# Altium PCB pira-smart-pcb.PcbDoc (part 1 of 3)
Units mm, origin at the board's own origin, x right, y up, seen from the top; angles counter-clockwise.
Board outline 65.1 x 30.1 mm, 2 copper layers (Top Layer, Bottom Layer); 85 components, 83 nets, 351 pads, 324 vias.
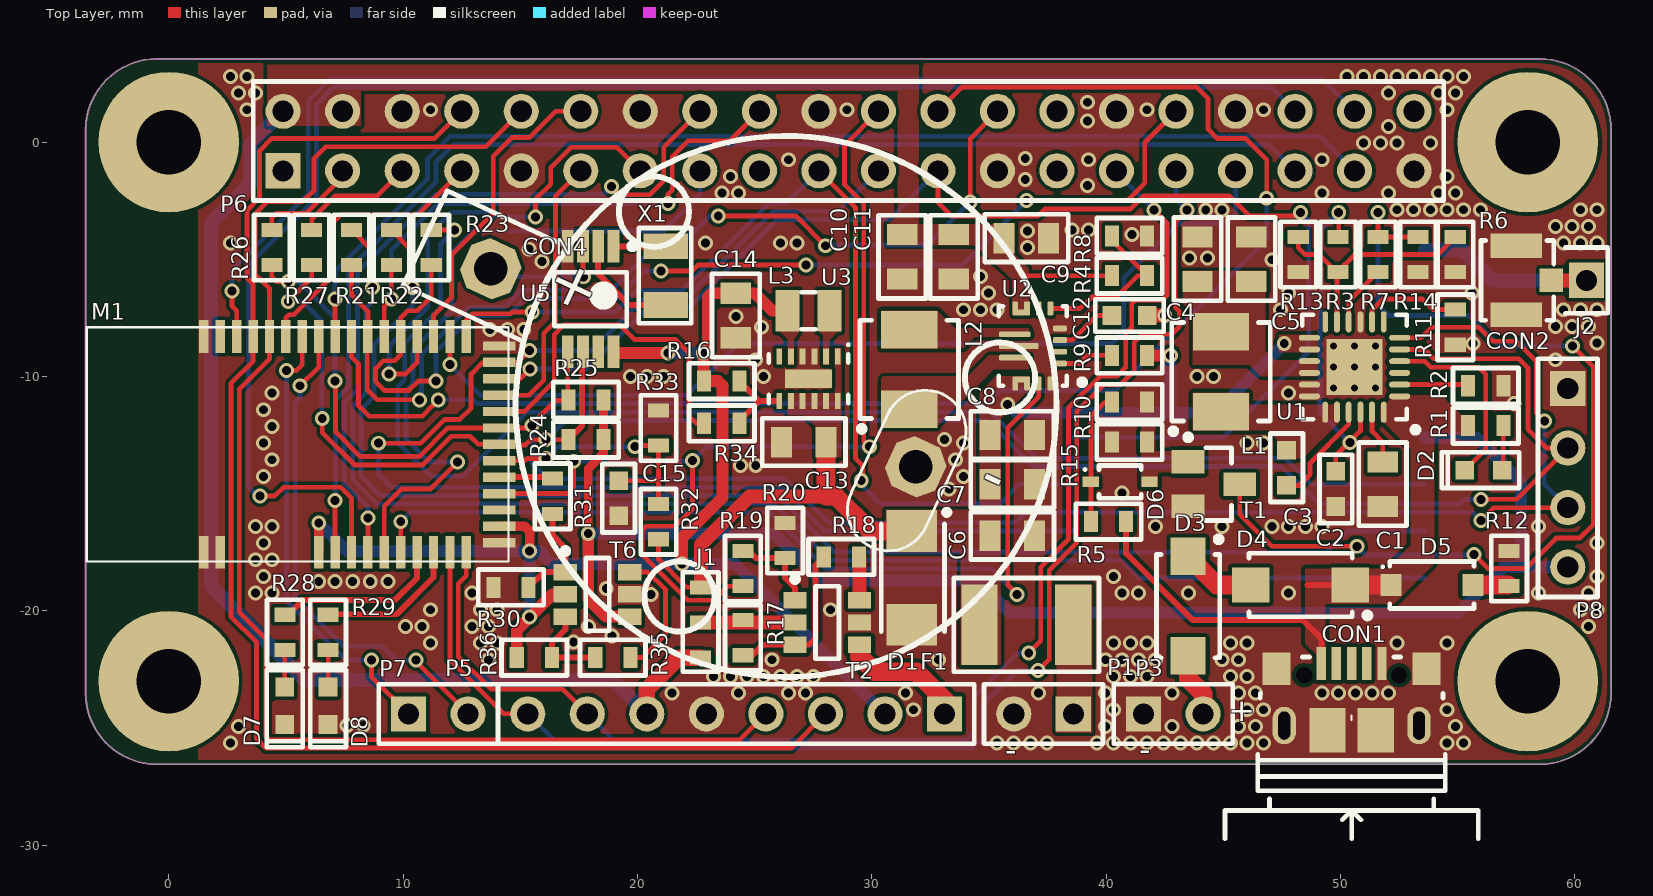
[diagram p0: Top Layer view]
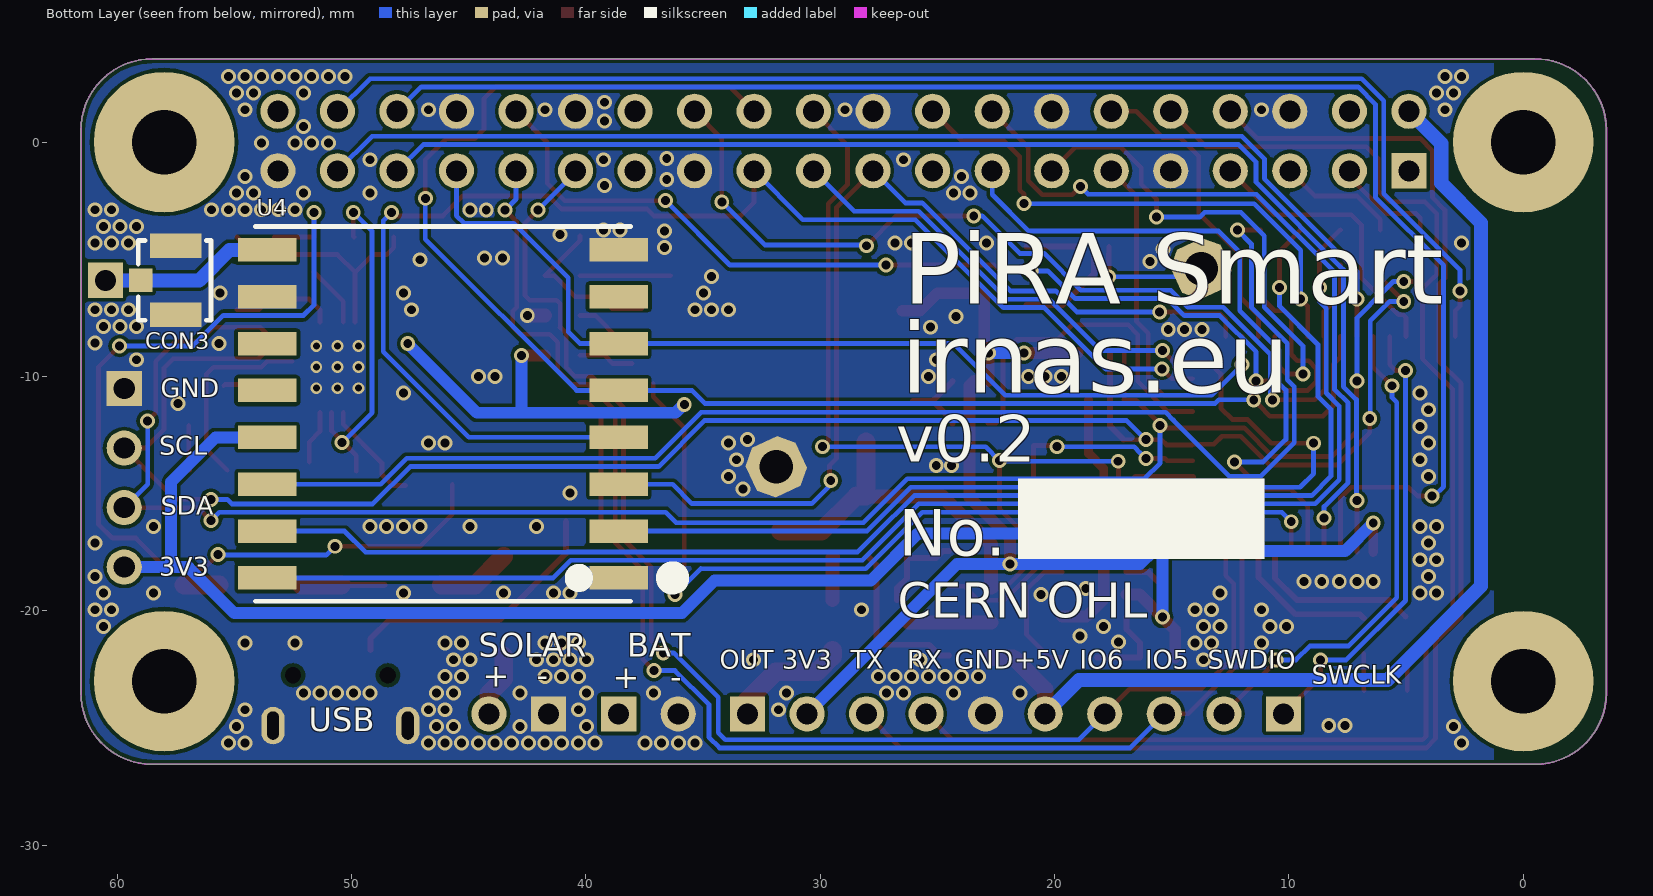
[diagram p1: Bottom Layer view, seen from below]

## Layer stack, top to bottom
Top Solder: solder mask 0.0102, Solder Resist, Dk 3.5
Top Layer: signal copper 0.0356
Dielectric 1: dielectric 0.32, FR-4, Dk 4.8
Bottom Layer: signal copper 0.0356
Bottom Solder: solder mask 0.0102, Solder Resist, Dk 3.5

## Board outline
-3.55,-23.5 -3.55,0.5 cw(c-0.5,0.5) -0.501,3.55 cw(c-0.5,3.5) -0.5,3.55 58.5,3.55 cw(c58.5,0.5) 61.55,0.5 61.55,-23.5 cw(c58.5,-23.5) 58.5,-26.55 -0.5,-26.55 cw(c-0.5,-23.5)

## Design rules (kind name [scope] priority, off if disabled: settings)
Clearance [All] p1: gap=0.152 ignorepadtopadclearanceinfootprint=FALSE except(0.076: SMDPad-SMDPad)
ComponentClearance [All] p1: gap=0 collisioncheckmode=3 verticalgap=0 showdistances=FALSE
HoleSize [All] p1: absolutevalues=TRUE maxlimit=3 minlimit=0.3 maxpercent=80.000 minpercent=20.000
PolygonConnect [All] p1: connectstyle=Direct reliefconductorwidth=0.254 reliefentries=4 polygonreliefangle="90 Angle" airgapwidth=0.254
RoutingVias [All] p1: holewidth=0.711 width=1.27 viastyle="Through Hole" minholewidth=0.711 minwidth=1.27 maxholewidth=0.711 maxwidth=1.27
SilkToSilkClearance [All] p1: silktosilkclearance=0
SolderMaskExpansion [All] p1: expansion=0.102
Width [All] p1: maxlimit=3 minlimit=0.203 preferedwidth=0.203
27 further rules are at their usual default settings.

## Components (designator, comment, footprint, x,y, rotation, side; value= is the part's Value field where it differs from the comment)
C1 "10uF /16V" CAP0805 51.8,-14.6 r270 top
C2 "4u7/16V" CAP0603 49.8,-14.8 r270 top
C3 "47n" CAP0603 47.7,-13.9 r270 top
C4 "10uF /16V" CAP0805 43.9,-5 r90 top
C5 "10uF /16V" CAP0805 46.2,-5 r90 top
C6 "10uF /16V" CAP0805 36,-16.8 r180 top
C7 "22u" CAP0805 36,-14.6 r180 top
C8 "22u" CAP0805 36,-12.5 r180 top
C9 "22u" CAP0805 36.6,-4.1 r180 top
C10 "22u" CAP0805 31.3,-4.9 r90 top
C11 "10uF /16V" CAP0805 33.5,-4.9 r90 top
C12 "100nF" CAP0603 41,-7.4 r180 top
C13 "10uF /16V" CAP0805 27.1,-12.8 r0 top
C14 "10uF /16V" CAP0805 24.2,-7.4 r90 top
C15 "33nF" CAP0603 19.2,-15.2 r90 top
CON1 "microUSB" microUSB-CHINA 50.475,-23.675 r0 top
CON2 "U.FL-R-SMT-1(10)" "uFL SMD connector" 57.5,-5.9 r270 top
CON3 "U.FL-R-SMT-1(10)" "uFL SMD connector" 57.5,-5.9 r90 bottom
CON4 "BATTERY" 1066_1066(PRIMARY) 26.322,-11.272 r155 top locked
D1 "RS1J-E3/61T.." SMC/DO-214AC 31.7,-18.6 r270 top
D2 "LED RED" LED0603 56.1,-14 r0 top
D3 "SE30AFG-M3/6A" SODFL127P600-8N 43.5,-19.8 r270 top
D4 "SE30AFG-M3/6A" SODFL127P600-8N 48.3,-18.9 r180 top
D5 "BZT52C6V2" SOD123 53.9,-18.9 r0 top
D6 "3V" "SOD-323 2L" 40.6,-14.5 r0 top
D7 "LED RED" LED0603 4.95,-24.05 r90 top
D8 "LED RED" LED0603 6.8,-24.05 r90 top
F1 "3A" Chip2PinSM127P600-8N 36.6,-20.6 r0 top
J1 "Jumper" JUMPER_NC 22.7,-19 r270 top
J2 "Socket" PIN1 60.5,-5.9 r180 top
L1 "1.5uH" FDSD0402 44.9,-9.8 r180 top
L2 "1.5uH" FDSD0402 31.6,-9.7 r180 top
L3 "2.2µH" INDC2214X15N 27.3,-7.2 r180 top
M1 "MDBT40" PCB_MDBT40_10X18 -3.5,-12.9 r90 top
P1 "Header 2" HDR1X2 38.6,-24.4 r180 top
P3 "Header 2" HDR1X2 41.6,-24.4 r0 top
P5 "Header 8" HDR1X8 33.1,-24.4 r180 top
P6 "Header 20X2" HDR2X20 4.882,-1.227 r0 top
P7 "Header 2" HDR1X2 10.236,-24.4 r0 top
P8 "Header 4" HDR1X4 59.7,-10.52 r270 top
R1 "470R" RES0603 56.2,-12.1 r0 top
R2 "0R" RES0603 56.2,-10.4 r180 top
R3 "5k6" RES0603 49.9,-4.8 r90 top
R4 "0R" RES0603 41,-5.7 r180 top
R5 "3k9" RES0603 40.1,-16.2 r0 top
R6 "10k" RES0603 54.9,-4.8 r90 top
R7 "220R" RES0603 51.6,-4.8 r270 top
R8 "150k" RES0603 41,-4 r180 top
R9 "10k" RES0603 41,-9.1 r180 top
R10 "10k" RES0603 41,-11.1 r180 top
R11 "0R" RES0603 54.9,-7.9 r90 top
R12 "10R" RES0603 57.2,-18.2 r270 top
R13 "33k" RES0603 48.2,-4.8 r90 top
R14 "470R" RES0603 53.3,-4.8 r90 top
R15 "10k" RES0603 41,-12.8 r0 top
R16 "100k" RES0603 23.6,-10.2 r0 top
R17 "100k" RES0603 24.5,-21.15 r270 top
R18 "100R" RES0603 28.7,-17.7 r0 top
R19 "100R" RES0603 24.5,-18.2 r270 top
R20 "100k" RES0603 26.3,-17 r90 top
R21 "10k" RES0603 7.8,-4.5 r90 top
R22 "10k" RES0603 9.5,-4.5 r90 top
R23 "10k" RES0603 11.2,-4.5 r90 top
R24 "4k7" RES0603 17.8,-12.7 r0 top
R25 "4k7" RES0603 17.8,-11 r0 top
R26 "0R" RES0603 4.4,-4.5 r270 top
R27 "0R" RES0603 6.1,-4.5 r270 top
R28 "470R" RES0603 4.952,-20.921 r270 top
R29 "470R" RES0603 6.802,-20.921 r270 top
R30 "100k" RES0603 14.6,-19 r180 top
R31 "100R" RES0603 16.383,-15.113 r90 top
R32 "249k" RES0603 20.9,-16.2 r270 top
R33 "100k" RES0603 20.9,-12.2 r270 top
R34 "0R" RES0603 23.6,-12 r180 top
R35 "100R" RES0603 18.95,-22 r0 top
R36 "100k" RES0603 15.6,-22 r180 top
T1 "MMBT3904" SOT23127P600-8N 44.6,-14.6 r0 top
T2 "DMG6602SVT" TSOT26 28.1,-20.5 r0 top
T6 "DMG6602SVT" TSOT26 18.3,-19.3 r0 top
U1 "BQ24296RGET" QFN4x4 50.6,-9.6 r0 top
U2 "TPS630701RNMT" "VQFN TPS" 37.063,-8.7 r90 top
U3 "TPS62740DSSR" SON50P200X265_HS-13N 27.3,-10.1 r270 top
U4 "Lora RFM95" Lora_module1 38.1,-3.6 r0 bottom
U5 "ISL1208IU8Z-T7A" TSOP65P500X110-8N 18,-6.7 r270 top
X1 "32.768KHZ" LFXTAL009678 21.2,-5.7 r90 top

## Footprints (in the part's own frame and the unit in brackets; to place one, negate y for a bottom-side part, rotate by r counter-clockwise, add the part's x,y. Pads: shape width x height; smd on the part's side, far side on the other; paste and mask are expansions set on the pad)
1066_1066(PRIMARY) [mm]
  oct 2.35x2.35 hole 1.422: NEG(-6.125,0) POS(13.875,0)
  silkscreen extent -11.57,-11.54 16.98,11.54, body extent -10.89,-11.5 16.54,11.5, height 8.68
CAP0603 [mm]
  rect 0.8x0.8 smd: 1(-0.75,0) 2(0.75,0)
  silkscreen extent -1.46,-0.7 1.46,0.7, body extent -0.8,-0.4 0.8,0.4, height 0.9
CAP0805 [mm]
  rect 0.9x1.3 smd: 1(-0.95,0) 2(0.95,0)
  silkscreen extent -1.78,-1.02 1.78,1.02, body extent -1,-0.6 1,0.6, height 1.5
Chip2PinSM127P600-8N [mm]
  rect 1.55x3.45 smd: 1(-2,0) 2(2,0)
  silkscreen extent -3.1,-2 3.1,2, body extent -2.41,-1.7 2.41,1.71, height 1.94
FDSD0402 [mm]
  rect 2.4x1.6 smd: 1(0,1.7) 2(0,-1.7)
  silkscreen extent -2.1,-2.1 2.16,2.66, body extent -2.1,-2.2 2.1,2.2, height 2.1
HDR1X2 [mm] "Connector; Header; 2 Position"
  rect 1.5x1.5 hole 0.9: 1(0,0)
  round 1.5 hole 0.9: 2(2.54,0)
  silkscreen extent -1.27,-1.27 3.81,1.27
HDR1X4 [mm] "Connector; Header; 4 Position"
  rect 1.5x1.5 hole 0.9: 1(0,0)
  round 1.5 hole 0.9: 2(2.54,0) 3(5.08,0) 4(7.62,0)
  silkscreen extent -1.27,-1.27 8.89,1.27
HDR1X8 [mm] "Connector; Header; 8 Position"
  rect 1.5x1.5 hole 0.9: 1(0,0)
  round 1.5 hole 0.9: 2(2.54,0) 3(5.08,0) 4(7.62,0) 5(10.16,0) 6(12.7,0) 7(15.24,0) 8(17.78,0)
  silkscreen extent -1.27,-1.27 19.05,1.27
HDR2X20 [mm] "Connector; Header; 20x2 Position"
  rect 1.5x1.5 hole 0.9: 1(0,0)
  round 1.5 hole 0.9: 2(0,2.54) 3(2.54,0) 4(2.54,2.54) 5(5.08,0) 6(5.08,2.54) 7(7.62,0) 8(7.62,2.54) 9(10.16,0) 10(10.16,2.54) 11(12.7,0) 12(12.7,2.54) 13(15.24,0) 14(15.24,2.54) 15(17.78,0) 16(17.78,2.54) 17(20.32,0) 18(20.32,2.54) 19(22.86,0) 20(22.86,2.54) 21(25.4,0) 22(25.4,2.54) 23(27.94,0) 24(27.94,2.54) 25(30.48,0) 26(30.48,2.54) 27(33.02,0) 28(33.02,2.54) 29(35.56,0) 30(35.56,2.54) 31(38.1,0) 32(38.1,2.54) 33(40.64,0) 34(40.64,2.54) 35(43.18,0) 36(43.18,2.54) 37(45.72,0) 38(45.72,2.54) 39(48.26,0) 40(48.26,2.54)
  silkscreen extent -1.27,-1.27 49.53,3.81
INDC2214X15N [mm] "Chip Inductor, 2-Leads, Body 2.20x1.45mm, IPC Medium Density"
  rect 1.02x1.78 smd: 1(-0.89,0) 2(0.89,0)
  silkscreen extent -0.3,-0.79 0.3,0.79, body extent -1.1,-0.72 1.1,0.73, height 1.49
JUMPER_NC [mm]
  rect 0.6x0.9 smd: 1(0,0) 2(3,0) 3(1.5,0)
  silkscreen extent -0.65,-0.76 3.6,0.76, body extent -0.05,-0.42 1.55,0.42, height 0.8
LED0603 [mm]
  rect 0.8x0.8 smd: 1(-0.8,0) 2(0.8,0)
  silkscreen extent -1.78,-0.76 1.52,0.76, body extent -0.85,-0.4 0.85,0.4, height 0.66
LFXTAL009678 [mm]
  rect 1.1x1.9 smd: 1(-1.25,0) 2(1.25,0)
  silkscreen extent -2.03,-1.1 2.03,1.14, body extent -1.65,-0.89 1.65,0.89, height 0.9
Lora_module1 [mm]
  rect 2.5x1 smd: 1(0.5,15) 2(0.5,13) 3(0.5,11) 4(0.5,9) 5(0.5,7) 6(0.5,5) 7(0.5,3) 8(0.5,1) 9(15.5,1) 10(15.5,3) 11(15.5,5) 12(15.5,7) 13(15.5,9) 14(15.5,11) 15(15.5,13) 16(15.5,15)
  silkscreen extent -2.16,0 16,16, body extent 0,0.1 16,16, height 2.23
microUSB-CHINA [mm]
  rect 0.4x1.4 smd mask+0.05: 1(-1.3,1.425) 2(-0.65,1.425) 3(0,1.425) 4(0.65,1.425) 5(1.3,1.425)
  rect 1.2x1.4 smd: 6(-3.2,1.2) 7(3.2,1.2)
  oval 1x1.6 hole 0.5 slot 1.2 at 90 deg: 8(-2.875,-1.225) 9(2.875,-1.225)
  rect 1.55x1.9 smd paste-10: 10(-1.025,-1.425) 11(1.025,-1.425)
  rect 0x0 hole 0.7 unplated: ""(-2.028,0.925) ""(2.022,0.925)
  silkscreen extent -5.4,-6.05 5.4,1.7, body extent -4.04,-3.83 4.04,1.73, height 2.77
PCB_MDBT40_10X18 [mm]
  rect 1.4x0.4 smd: 1(-4.6,-5) 2(-4.6,-5.7) 3(-4.6,-9.9) 4(-4.6,-10.6) 5(-4.6,-11.3) 6(-4.6,-12) 7(-4.6,-12.7) 8(-4.6,-13.4) 9(-4.6,-14.1) 10(-4.6,-14.8) 11(-4.6,-15.5) 12(-4.6,-16.2) 26(4.6,-16.2) 27(4.6,-15.5) 28(4.6,-14.8) 29(4.6,-14.1) 30(4.6,-13.4) 31(4.6,-12.7) 32(4.6,-12) 33(4.6,-11.3) 34(4.6,-10.6) 35(4.6,-9.9) 36(4.6,-9.2) 37(4.6,-8.5) 38(4.6,-7.8) 39(4.6,-7.1) 40(4.6,-6.4) 41(4.6,-5.7) 42(4.6,-5)
  rect 0.4x1.4 smd: 13(-4.2,-17.6) 14(-3.5,-17.6) 15(-2.8,-17.6) 16(-2.1,-17.6) 17(-1.4,-17.6) 18(-0.7,-17.6) 19(0,-17.6) 20(0.7,-17.6) 21(1.4,-17.6) 22(2.1,-17.6) 23(2.8,-17.6) 24(3.5,-17.6) 25(4.2,-17.6)
  silkscreen extent -5,-18 5,0
PIN1 [mm] "Connector; Plug"
  rect 1.5x1.5 hole 0.9: 1(0,0)
  silkscreen extent -0.9,-1.4 0.9,1.4
QFN4x4 [mm]
  oval 0.9x0.25 smd: 1(1.925,-1.25) 2(1.925,-0.75) 3(1.925,-0.25) 4(1.925,0.25) 5(1.925,0.75) 6(1.925,1.25) 13(-1.925,1.25) 14(-1.925,0.75) 15(-1.925,0.25) 16(-1.925,-0.25) 17(-1.925,-0.75) 18(-1.925,-1.25)
  oval 0.25x0.9 smd: 7(1.25,1.925) 8(0.75,1.925) 9(0.25,1.925) 10(-0.25,1.925) 11(-0.75,1.925) 12(-1.25,1.925) 19(-1.25,-1.925) 20(-0.75,-1.925) 21(-0.25,-1.925) 22(0.25,-1.925) 23(0.75,-1.925) 24(1.25,-1.925)
  rect 2.4x2.4 smd: 25(0,0)
  silkscreen extent -2.22,-2.8 2.73,2.22, body extent -2.09,-2.09 2.08,2.08, height 1
RES0603 [mm]
  rect 0.6x0.9 smd: 1(-0.75,0) 2(0.75,0)
  silkscreen extent -1.4,-0.76 1.4,0.76, body extent -0.8,-0.42 0.8,0.42, height 0.8
SMC/DO-214AC [mm]
  rect 1.78x2.16 smd: 1(-2,0) 2(2,0)
  silkscreen extent -2.91,-1.3 2.3,1.61, body extent -2.5,-1.35 2.5,1.35, height 2.21
SOD123 [mm] "SODFL, 2-Leads, Body 1.55x3.70mm, IPC Medium Density"
  rect 0.9x0.95 smd: 1(-1.75,0) 2(1.75,0)
  silkscreen extent -2.15,-1 1.8,1, body extent -1.85,-0.8 1.85,0.8, height 1.27
"SOD-323 2L" [mm]
  rect 0.7x0.45 smd: 1(-1.25,0) 2(1.25,0)
  silkscreen extent -1.55,-0.7 0.9,0.7, body extent -1.1,-0.67 1.1,0.68, height 1.1
SODFL127P600-8N [mm]
  rect 1.6x1.5 smd: 1(-2.125,0) 2(2.125,0)
  silkscreen extent -2.97,-1.35 2.2,1.43, body extent -2.6,-1.35 2.6,1.35, height 1
SON50P200X265_HS-13N [mm] "SON, 12-Leads, Body 3.00x2.00mm, Pitch 0.50mm, Thermal Pad 2.00x0.79mm, IPC Medium Density"
  rect 0.7x0.25 smd: 1(-0.95,1.25) 2(-0.95,0.75) 3(-0.95,0.25) 4(-0.95,-0.25) 5(-0.95,-0.75) 6(-0.95,-1.25) 7(0.95,-1.25) 8(0.95,-0.75) 9(0.95,-0.25) 10(0.95,0.25) 11(0.95,0.75) 12(0.95,1.25)
  rect 0.79x2 smd: 13(0,0)
  silkscreen extent -1.5,-1.7 1.05,1.75, body extent -1.13,-1.55 1.13,1.55, height 2.65
SOT23127P600-8N [mm]
  rect 1.4x1 smd: 1(-1.1,0.95) 2(-1.1,-0.95) 3(1.1,0)
  silkscreen extent -1.22,-1.55 0.75,2.12, body extent -1.35,-1.56 1.35,1.56, height 1.2
TSOP65P500X110-8N [mm] "TSOP, 8-Leads, Body 3.00x3.00mm, Pitch 0.65mm, IPC Medium Density"
  rect 1.4x0.5 smd: 1(-2.25,0.975) 2(-2.25,0.325) 3(-2.25,-0.325) 4(-2.25,-0.975) 5(2.25,-0.975) 6(2.25,-0.325) 7(2.25,0.325) 8(2.25,0.975)
  silkscreen extent -2.37,-1.55 1.15,1.9, body extent -1.55,-1.55 1.55,1.55, height 1.1
TSOT26 [mm]
  rect 1x0.7 smd: 1(-1.375,0.95) 2(-1.375,0) 3(-1.375,-0.95) 4(1.375,-0.95) 5(1.375,0) 6(1.375,0.95)
  silkscreen extent -1.5,-1.55 0.5,1.97, body extent -1.5,-1.55 1.5,1.55, height 1
"uFL SMD connector" [mm]
  rect 1x1 smd: 1(0,1.5)
  rect 1.05x2.2 smd: 2(-1.475,0) 2(1.475,0)
  silkscreen extent -1.7,-1.5 1.7,1.6, body extent -1.7,-1.55 1.7,1.55, height 1.25
"VQFN TPS" [mm]
  rrect50% 0.25x0.6 smd: 1(-0.75,-0.962) 2(-0.25,-0.962) 3(0.25,-0.962) 4(0.75,-0.962)
  rrect50% 0.6x0.25 smd: 5(1.6,-0.562) 6(1.6,-0.062) 7(1.6,0.438) 8(1.6,0.938) 12(-1.6,0.938) 13(-1.6,0.438) 14(-1.6,-0.062) 15(-1.6,-0.562)
  rrect50% 0.25x0.7 smd: 7(1.425,0.688) 13(-1.425,0.688)
  rrect50% 0.25x1.35 smd: 9(0.5,0.963) 11(-0.5,0.963)
  rrect50% 0.25x1.7 smd: 10(0,0.788)
  silkscreen extent -1.7,-2.04 1.7,1.64, body extent -1.56,-1.12 1.56,1.5, height 1

## Part data
C1 C4 C5 C6 C11: "TDK - CGA4J1X5R1C106K125AC - CAP, MLCC, X5R, 10UF, 16V, 0805", Manufacturer=TDK, Manufacturer Part Number=CGA4J1X5R1C106K125AC, Supplier Part Number 1=2320856, ComponentLink1Description=http://bcove.me/e1v54mtm, ComponentLink1URL=http://bcove.me/e1v54mtm, ComponentLink2Description=http://www.farnell.com/datasheets/1936565.pdf, ComponentLink2URL=http://www.farnell.com/datasheets/1936565.pdf, ComponentLink3Description=http://www.farnell.com/datasheets/1683658.pdf, ComponentLink3URL=http://www.farnell.com/datasheets/1683658.pdf, RoHS=YES, Supplier 1=Farnell
C2: library part "4u7  16V 0603", "MURATA - GRM188R61C475KAAJD - CAP, MLCC, X5R, 4.7UF, 16V, 0603", Capacitance=4.7, Capacitance Tolerance="± 10%", Ceramic Capacitor Case="0603 [1608 Metric]", Dielectric Characteristic=X5, Manufacturer=MURATA, Manufacturer Part Number=GRM188R61C475KAAJD, Operating Temperature Max=85, Operating Temperature Min=-55, Supplier Part Number 1=2611924, Voltage Rating=16, Automotive Qualification Standard=-, ComponentLink1Description=http://www.farnell.com/datasheets/2079168.pdf, ComponentLink1URL=http://www.farnell.com/datasheets/2079168.pdf, MSL="MSL 1 - Unlimited", Packaging="Cut Tape", Pricing 1="10=0.16, 100=0.0929, 500=0.076, 1000=0.0618, 2000=0.0605, 4000=0.0425, 20000=0.0409, 40000=0.0355 (GBP)", Product Range="GRM Series", RoHS=YES, Stock 1=5038, Supplier 1=Farnell, SVHC="No SVHC (17-Dec-2015)<!--FANDB--><div class=\"features-and-benefits-container\"><div class=\"features-and-benefits-desc-container\"><span class=\"features-and-benefits-container-desc\">SMD Multilayer Ceramic Capacitor, 0603 [1608 Metric], 4.7 µF, 16 V, ± 10%, X5"
C3: library part "47nF / 50V", "MULTICOMP - MC0603B473K500CT - CAP, MLCC, X7R, 47NF, 50V, 0603", Manufacturer=MULTICOMP, Manufacturer Part Number=MC0603B473K500CT, Supplier Part Number 1=1759116, ComponentLink1Description=http://www.farnell.com/datasheets/1901289.pdf, ComponentLink1URL=http://www.farnell.com/datasheets/1901289.pdf, Pricing 1="10=0.0102, 100=0.0086, 500=0.0069, 1000=0.0059, 2000=0.0051 (GBP)", RoHS=YES, Stock 1=34893, Supplier 1=Farnell
C7 C8 C9 C10: library part "22u 6.3V 0805", "MULTICOMP - MC0805X226M6R3CT - CAP, MLCC, X5R, 22UF, 0805", Capacitance=22, Capacitance Tolerance="± 20%", Capacitor Terminals=SMD, Ceramic Capacitor Case="0805 [2012 Metric]", Dielectric Characteristic=X5, Manufacturer=MULTICOMP, Manufacturer Part Number=MC0805X226M6R3CT, Operating Temperature Max=85, Operating Temperature Min=-55, Operating Temperature Range="-55°C to +85°C<!--FANDB--><div class=\"features-and-benefits-container\"><div class=\"features-and-benefits-desc-container\"><span class=\"features-and-benefits-container-desc\">SMD Multilayer Ceramic Capacitor, 0805 [2012 Metric], 22 µF, 6.3 V, ± 20%, X5R, MC Series</span></div><div class=\"features-and-benefits-description\"><span class=\"features-benefits-value\">The Multicomp MC series is general purpose MLCC capacitors with X5R dielectric material which provides high electrical precision, stability and reliability. This MLCC capacitor consists of a conducting material and electrodes with high density and high efficiency ceramic condensers.</span></div><div class=\"features-and-benefits-list\"><ul class=\"features-and-benefits-list-list\"><li class=\"features-and-benefits-list-item\">Small size with higher capacitance values</li><li class=\"features-and-benefits-list-item\">0201, 0402, 0603, 0805, 1206, 1210, 1812 case sizes available</li><li class=\"features-and-benefits-list-item\">Capacitance value ranging from 100pF to 220?F</li><li class=\"features-and-benefits-list-item\">Capacitor with lead free termination (pure Tin)</li><li class=\"features-and-benefits-list-item\">High electrical precision, stability and reliability</li><li class=\"features-and-benefits-list-item\">Rated voltage of 4V, 6.3V, 10V, 16V, 25V, 50V</li><li class=\"features-and-benefits-list-item\">Operating temperature of -55°C to +85°C</li><li class=\"features-and-benefits-list-item\">Available in ±10% and ±20", Supplier Part Number 1=1759415, Voltage Rating=6.3, Automotive Qualification Standard=-, Capacitance Tolerance ±="± 20%", ComponentLink1Description=http://www.farnell.com/datasheets/1901289.pdf, ComponentLink1URL=http://www.farnell.com/datasheets/1901289.pdf, ComponentLink2Description=http://www.farnell.com/datasheets/1932399.pdf, ComponentLink2URL=http://www.farnell.com/datasheets/1932399.pdf, MSL=-, Packaging="Cut Tape", Pricing 1="5=0.128, 50=0.0738, 250=0.0507, 500=0.042, 1500=0.0358 (GBP)", Product Range="MC Series", RoHS=YES, Stock 1=74736, Supplier 1=Farnell, SVHC="No SVHC (07-Jul-2017)"
C12: "MURATA - GRM188R71C104KA01J - CAP, MLCC, X7R, 0.1UF, 16V, 0603", Capacitance=0.1, Capacitance Tolerance="± 10%", Ceramic Capacitor Case="0603 [1608 Metric]", Dielectric Characteristic=X7, Manufacturer=MURATA, Manufacturer Part Number=GRM188R71C104KA01J, Operating Temperature Max=125, Operating Temperature Min=-55, Supplier Part Number 1=2688519, Voltage Rating=16, Automotive Qualification Standard=-, ComponentLink1Description=http://www.farnell.com/datasheets/2189124.pdf, ComponentLink1URL=http://www.farnell.com/datasheets/2189124.pdf, MSL="MSL 1 - Unlimited", Packaging="Cut Tape", Pricing 1="10=0.0145, 100=0.0126, 500=0.0081, 2500=0.0059, 5000=0.0052, 10000=0.0046, 50000=0.0036, 100000=0.0035 (GBP)", Product Range="GRM Series", RoHS=YES, Stock 1=18297, Supplier 1=Farnell, SVHC="No SVHC (20-Jun-2016"
C13 C14: "TDK - CGA4J1X5R1C106K125AC - CAP, MLCC, X5R, 10UF, 16V, 0805", Manufacturer=TDK, Manufacturer Part Number=CGA4J1X5R1C106K125AC, Supplier Part Number 1=2210948RL, ComponentLink1Description=http://bcove.me/e1v54mtm, ComponentLink1URL=http://bcove.me/e1v54mtm, ComponentLink2Description=http://www.farnell.com/datasheets/1936565.pdf, ComponentLink2URL=http://www.farnell.com/datasheets/1936565.pdf, ComponentLink3Description=http://www.farnell.com/datasheets/1683658.pdf, ComponentLink3URL=http://www.farnell.com/datasheets/1683658.pdf, Pricing 1="5=0.41, 50=0.146, 250=0.131, 500=0.12, 1000=0.103 (GBP)", RoHS=YES, Stock 1=8974, Supplier 1=Farnell
C15: "MULTICOMP   MC0603B333K250CT   Multilayer Ceramic Capacitor, MC Series, 0.033 F,  10%, X7R, 25 V, 0603 [1608 Metric]", Capacitance Tolerance="± 10%", Capacitor Case Style="0603 [1608 Metric]", Capacitor Terminals=SMD, Dielectric Characteristic=X7R, Manufacturer=Multicomp, Manufacturer Part Number=MC0603B333K250CT, Operating Temperature Max=125°C, Operating Temperature Min=-55°C, Voltage Rating=25V, Capacitance=33nF, ComponentLink1Description=https://datasheet.ciiva.com/22675/1901289-22675775.pdf, ComponentLink1URL=https://datasheet.ciiva.com/22675/1901289-22675775.pdf, MSL="(Not Available)", Packaging="Full Reel", Pricing 1="10=0.0225, 100=0.0163, 500=0.0101, 1000=0.0083, 2000=0.007 (EUR)", Stock 1=9606, Supplier 1=Farnell, SVHC="To Be Advised"
CON1: library part "Micro USB CHINA 1"
CON2 CON3: "HIROSE(HRS) - U.FL-R-SMT-1(10) - RF COAXIAL, U.FL, STRAIGHT JACK, 50OHM", Frequency Max=6, Manufacturer=HIROSE(HRS), Operating Temperature Max=90, Operating Temperature Min="-40°C<!--FANDB--><div class=\"features-and-benefits-container\"><div class=\"features-and-benefits-description\"><span class=\"features-benefits-value\">The U. FL-R-SMT-1(10) from Hirose is a straight ultra miniature SMT coaxial receptacle. These connectors offer high frequency performance from DC to 6GHz and impedance of 50 ohm to meet the frequency requirements of a wide variety of miniature equipments.</span></div><div class=\"features-and-benefits-list\"><ul class=\"features-and-benefits-list-list\"><li class=\"features-and-benefits-list-item\">Phosphor bronze with gold plated contacts</li><li class=\"features-and-benefits-list-item\">LCP insulator</li><li class=\"features-and-benefits-list-item\">VSWR of 1.3max at 0 to 3GHz</li><li class=\"features-and-benefits-list-item\">Operating temperature range from -40°C to 90", Supplier Part Number 1=1688077, Coaxial Cable Types=-, Coaxial Termination="Surface Mount Vertical", ComponentLink1Description=http://www.farnell.com/cad/2110742.pdf, ComponentLink1URL=http://www.farnell.com/cad/2110742.pdf, ComponentLink2Description=http://bcove.me/8op6hfnt, ComponentLink2URL=http://bcove.me/8op6hfnt, ComponentLink3Description=http://www.farnell.com/datasheets/1947917.pdf, ComponentLink3URL=http://www.farnell.com/datasheets/1947917.pdf, ComponentLink4Description=http://www.farnell.com/cad/2115175.stp, ComponentLink4URL=http://www.farnell.com/cad/2115175.stp, Connector Body Style="Straight Jack", Connector Mounting="PCB Mount", Connector Type="U.FL Coaxial", Contact Material=Brass, Contact Plating="Gold Plated Contacts", Impedance=50, Manufacturer Part Number=U.FL-R-SMT-1(10), Pricing 1="1=0.5, 25=0.49, 100=0.468, 150=0.446, 250=0.424, 1000=0.394 (GBP)", Product Range=-, RoHS=YES, Stock 1=118146, Supplier 1=Farnell
CON4: library part 1066, "HOLDER BATT COIN COMPACT 20MM", Manufacturer="Keystone Electronics", Max Operating Temperature=145°C, Min Operating Temperature=-50°C, Package Quantity=1, Supplier Part Number 1=2293258, Approvals=UL, Body Material=Nylon,Glass, ComponentLink1Description=https://datasheet.ciiva.com/3/1066-3994.pdf, ComponentLink1URL=https://datasheet.ciiva.com/3/1066-3994.pdf, ComponentLink2Description=https://datasheet.ciiva.com/1391/1718229-1391198.pdf, ComponentLink2URL=https://datasheet.ciiva.com/1391/1718229-1391198.pdf, ComponentLink3Description=https://datasheet.ciiva.com/12342/m60p3-4068-12342995.pdf, ComponentLink3URL=https://datasheet.ciiva.com/12342/m60p3-4068-12342995.pdf, ComponentLink4Description=https://datasheet.ciiva.com/18403/70181436-18403177.pdf, ComponentLink4URL=https://datasheet.ciiva.com/18403/70181436-18403177.pdf, ComponentLink5Description=https://datasheet.ciiva.com/22643/1814063-22643020.pdf, ComponentLink5URL=https://datasheet.ciiva.com/22643/1814063-22643020.pdf, ComponentLink6Description=https://datasheet.ciiva.com/16322/m60-2p3-16322780.pdf, ComponentLink6URL=https://datasheet.ciiva.com/16322/m60-2p3-16322780.pdf, Contact Material=Bronze,Copper,Tin, Contact Plating=Tin, Diameter=20mm, Lead Free="Lead Free", Manufacturer Part Number=1066, Material=Bronze, Mount="Through Hole,Holder,PCB", Number of Batteries=1, Number of Cells=1, Packaging=Bulk, Pricing 1="1=1, 50=0.97, 100=0.947, 500=0.927, 1000=0.847 (EUR)", REACH SVHC="No SVHC", Stock 1=17073, Supplier 1=Farnell, Termination="PC Pin"
D1: "VISHAY - RS1J-E3/61T.. - DIODE, FAST, 1A, 600V, SMD", Alternate Case Style=DO-214, Current Ifsm=30, Forward Current If(AV)=1, Forward Voltage=1.3, Junction Temperature Tj Max=150, Manufacturer=VISHAY, Operating Temperature Min=-55, Operating Temperature Range="-55°C to +150", Repetitive Reverse Voltage Vrrm Max=600, Supplier Part Number 1=9550143, Automotive Qualification Standard=-, ComponentLink1Description=http://www.vishay.com/docs/88869/packagin.pdf, ComponentLink1URL=http://www.vishay.com/docs/88869/packagin.pdf, ComponentLink2Description=http://www.vishay.com/doc?88707, ComponentLink2URL=http://www.vishay.com/doc?88707, ComponentLink3Description=http://www.farnell.com/datasheets/2244878.pdf, ComponentLink3URL=http://www.farnell.com/datasheets/2244878.pdf, Diode Case Style=DO-214, Diode Configuration=Single, Diode Type="Fast Recovery", External Depth=2.79, External Length / Height=2.29, External Width=5.28, Forward Current If Max=1, Forward Surge Current Ifsm Max=30, Forward Voltage VF Max=1.3, Manufacturer Part Number=RS1J-E3/61T.., No. of Pins="2 Pin", Operating Temperature Max=150, Packaging="Cut Tape", Pricing 1="10=0.164, 100=0.111, 200=0.093, 500=0.0847, 1000=0.083, 3000=0.0813, 9000=0.0796, 30000=0.0779 (GBP)", Product Range=RS1, Reverse Recovery Time trr Max=250, RoHS=YES, Stock 1=4705, Supplier 1=Farnell, SVHC="No SVHC (15-Jun-2015)", Tape Width="12mm<!--FANDB--><div class=\"features-and-benefits-container\"><div class=\"features-and-benefits-desc-container\"><span class=\"features-and-benefits-container-desc\">Fast / Ultrafast Diode, 600 V, 1 A, Single, 1.3 V, 250 ns, 30 A</span></div><div class=\"features-and-benefits-description\"><span class=\"features-benefits-value\">The RS1J-E3/5AT is a surface-mount Fast Switching Rectifier with solderable matte tin-plated terminals. It is suitable for use in fast switching rectification of power supply, inverters, converters and freewheeling diodes.</span></div><div class=\"features-and-benefits-list\"><ul class=\"features-and-benefits-list-list\"><li class=\"features-and-benefits-list-item\">Colour band denotes cathode end</li><li class=\"features-and-benefits-list-item\">Low-profile package</li><li class=\"features-and-benefits-list-item\">Ideal for automated placement</li><li class=\"features-and-benefits-list-item\">Glass-passivated pallet chip junction</li><li class=\"features-and-benefits-list-item\">Fast switching for high efficiency</li><li class=\"features-and-benefits-list-item\">High forward surge capability</li><li class=\"features-and-benefits-list-item\">Meets MSL level 1 as per J-STD-020, LF maximum peak of 260°C</li><li class=\"features-and-benefits-list-item\">AEC-Q101 qualified</li><li class=\"features-and-benefits-list-item\">UL94V-0 Flammability rating</li></ul></div><div class=\"features-and-benefits-applications\"><ul class=\"features-and-benefits-value\"><li class=\"features-and-benefits-list-item\">Power Management</li><li class=\"features-and-benefits-list-item\">Consumer Electronics</li><li class=\"features-and-benefits-list-item\">Commercial</li><li class=\"features-and-benefits-list-item\">Communications & Networking</li><li class=\"features-and-benefits-list-item\">Automotive</li></ul></div></div>"
D2 D7 D8: "BROADCOM LIMITED - HSMS-C190 - LED, RED, 10MCD, 626NM", Forward Current If=20, Forward Voltage=2.1, LED Colour=Red, Manufacturer="BROADCOM LIMITED", Manufacturer Part Number=HSMS-C190, Supplier Part Number 1=2497356, Automotive Qualification Standard=-, Bulb Size=-, ComponentLink1Description=http://www.farnell.com/datasheets/313031.pdf, ComponentLink1URL=http://www.farnell.com/datasheets/313031.pdf, ComponentLink2Description=http://www.farnell.com/datasheets/1681524.pdf, ComponentLink2URL=http://www.farnell.com/datasheets/1681524.pdf, ComponentLink3Description=http://www.farnell.com/datasheets/2165483.pdf, ComponentLink3URL=http://www.farnell.com/datasheets/2165483.pdf, LED Mounting=SMD, Lens Shape=Rectangular, Luminous Intensity=10, MSL=-, Packaging="Cut Tape", Pricing 1="1=0.361, 10=0.256, 50=0.235, 100=0.106, 200=0.101 (GBP)", Product Range=-, RoHS=YES, Stock 1=7534, Supplier 1=Farnell, SVHC="No SVHC (17-Dec-2015)<!--FANDB--><div class=\"features-and-benefits-container\"><div class=\"features-and-benefits-description\"><span class=\"features-benefits-value\">The HSMS-C190 is a HER SMD Chip LED with untinted/diffused lens, made of GaP. It is designed in an industry standard package 1.6 x 0.8mm footprint with 0.8mm profile. It is compatible with IR reflow solder processes. The small size and wide viewing angle make this LED prime choices for backlighting applications and front panel illumination especially where space is a premium.</span></div><div class=\"features-and-benefits-list\"><ul class=\"features-and-benefits-list-list\"><li class=\"features-and-benefits-list-item\">Small size</li><li class=\"features-and-benefits-list-item\">Industry standard footprint</li><li class=\"features-and-benefits-list-item\">Compatible with IR solder</li><li class=\"features-and-benefits-list-item\">Diffused optics</li><li class=\"features-and-benefits-list-item\">-40 to 85", Viewing Angle=170°, Wavelength Typ=626
D3 D4: "VISHAY - SE30AFG-M3/6A - RECTIFIER, ESD, 400V, 3A, DO-221AC", Diode Case Style=DO-221, Forward Current If(AV)=3, Forward Surge Current Ifsm Max=40, Forward Voltage VF Max=1.1, Manufacturer=VISHAY, Operating Temperature Max=175, Operating Temperature Min="-55°C<!--FANDB--><div class=\"features-and-benefits-container\"><div class=\"features-and-benefits-desc-container\"><span class=\"features-and-benefits-container-desc\">Standard Recovery Diode, 400 V, 3 A, Single, 1.1 V, 1.5 µs, 40 A</span></div><div class=\"features-and-benefits-description\"><span class=\"features-benefits-value\">The SE30AFG-M3/6A is a surface-mount ESD Capability Rectifier with matte tin-plated solderable leads. It is suitable for use in general-purpose, polarity protection and rail-to-rail protection.</span></div><div class=\"features-and-benefits-list\"><ul class=\"features-and-benefits-list-list\"><li class=\"features-and-benefits-list-item\">Oxide planar chip junction</li><li class=\"features-and-benefits-list-item\">Low forward voltage drop, low leakage current</li><li class=\"features-and-benefits-list-item\">Very low profile - Typical height of 0.95", Repetitive Reverse Voltage Vrrm Max=400, Supplier Part Number 1=2313878, Automotive Qualification Standard=-, ComponentLink1Description=http://www.farnell.com/datasheets/2049981.pdf, ComponentLink1URL=http://www.farnell.com/datasheets/2049981.pdf, Diode Configuration=Single, Diode Type="Standard Recovery", Manufacturer Part Number=SE30AFG-M3/6A, MSL="MSL 1 - Unlimited", No. of Pins=2, Packaging=Each, Pricing 1="1=0.306, 25=0.0765, 100=0.0753, 250=0.0729, 500=0.072, 1000=0.0654 (GBP)", Product Range=SE30, Reverse Recovery Time trr Max=1.5, RoHS=YES, Stock 1=13984, Supplier 1=Farnell
D5: "DIODES INC. - BZT52C6V2 - DIODE, ZENER, 6.2V, 0.5W, SOD-123", Diode Case Style=SOD-123, Manufacturer="DIODES INC.", Operating Temperature Max=150, Operating Temperature Min=-65, Operating Temperature Range="-65°C to +150°C<!--FANDB--><div class=\"features-and-benefits-container\"><div class=\"features-and-benefits-desc-container\"><span class=\"features-and-benefits-container-desc\">Zener Single Diode, 6.2 V, 500 mW, SOD-123, 6 %, 2 Pins, 150 °C</span></div><div class=\"features-and-benefits-description\"><span class=\"features-benefits-value\">The BZT52C6V2 is a surface mount Zener Diode with moulded plastic case, matte tin annealed over Alloy 42 lead frame (lead-free plating) terminals and cathode band polarity. It is ideally suited for automated assembly processes.</span></div><div class=\"features-and-benefits-list\"><ul class=\"features-and-benefits-list-list\"><li class=\"features-and-benefits-list-item\">Planar die construction</li><li class=\"features-and-benefits-list-item\">500mW Power dissipation</li><li class=\"features-and-benefits-list-item\">General purpose, medium current</li><li class=\"features-and-benefits-list-item\">Totally lead-free</li><li class=\"features-and-benefits-list-item\">Halogen and antimony-free - Green device</li><li class=\"features-and-benefits-list-item\">Qualified to AEC-Q101 standards for high reliability</li></ul></div><div class=\"features-and-benefits-applications\"><ul class=\"features-and-benefits-value\"><li class=\"features-and-benefits-list-item\">Automation & Process Control</li></ul></div></div>", Power Dissipation Pd=500, Supplier Part Number 1=1902438, Zener Tolerance ±=6%, Zener Voltage Vz Typ=6.2, Automotive Qualification Standard=-, ComponentLink1Description=http://www.farnell.com/datasheets/1670962.pdf, ComponentLink1URL=http://www.farnell.com/datasheets/1670962.pdf, Manufacturer Part Number=BZT52C6V2, MSL="MSL 1 - Unlimited", No. of Pins=2, Packaging="Cut Tape", Pricing 1="1=0.415, 25=0.264, 100=0.0727, 250=0.0546, 500=0.047, 1000=0.0334, 3000=0.0278, 7000=0.0236 (GBP)", Product Range="BZT52 Series", RoHS=YES, Stock 1=4408, Supplier 1=Farnell, SVHC="No SVHC (12-Jan-2017)"
D6: library part MM3Z3V0T1G, "ON SEMICONDUCTOR - MM3Z3V0T1G - ZENER DIODE, 200MW, 3V, SOD-323", Diode Case Style=SOD-323, Manufacturer="ON SEMICONDUCTOR", Operating Temperature Max=150, Power Dissipation Pd=300, Supplier Part Number 1=2463510, Zener Tolerance ±=5%, Zener Voltage Vz Typ=3, Automotive Qualification Standard=-, ComponentLink1Description=http://www.farnell.com/datasheets/1876691.pdf, ComponentLink1URL=http://www.farnell.com/datasheets/1876691.pdf, ComponentLink2Description=http://www.farnell.com/datasheets/2306645.pdf, ComponentLink2URL=http://www.farnell.com/datasheets/2306645.pdf, Manufacturer Part Number=MM3Z3V0T1G, MSL="MSL 1 - Unlimited<!--FANDB--><div class=\"features-and-benefits-container\"><div class=\"features-and-benefits-desc-container\"><span class=\"features-and-benefits-container-desc\">Zener Single Diode, 3 V, 300 mW, SOD-323, 5 %, 2 Pins, 150 °C</span></div></div>", No. of Pins=2, Packaging="Cut Tape", Pricing 1="5=0.126, 50=0.0544, 250=0.0443, 500=0.0288, 1500=0.0274 (GBP)", Product Range="MM3Z3 Series", RoHS=YES, Stock 1=6591, Supplier 1=Farnell, SVHC="No SVHC (07-Jul-2017)"
F1: library part "PTC FUSE 3A", "LITTELFUSE - MINISMDC150F/24-2 - POLYSWITCH, SMD, 1812, 1.5A", Manufacturer=LITTELFUSE, Manufacturer Part Number=MINISMDC150F/24-2, Supplier Part Number 1=1345929, ComponentLink1Description=http://www.farnell.com/datasheets/2363925.pdf, ComponentLink1URL=http://www.farnell.com/datasheets/2363925.pdf, ComponentLink2Description=http://www.farnell.com/datasheets/2282569.pdf, ComponentLink2URL=http://www.farnell.com/datasheets/2282569.pdf, Pricing 1="1=0.463, 50=0.382, 100=0.327, 250=0.302, 500=0.256, 1000=0.254, 5000=0.253, 10000=0.251 (GBP)", RoHS=YES, Stock 1=9256, Supplier 1=Farnell
L1 L2: library part "1.5uH 5.1A", "MURATA - FDSD0420-H-1R5M=P3 - INDUCTOR, SHIELDED, 1.5UH, 5.1A, 20%", DC Resistance Max=0.036, Inductance=1.5, Inductance Tolerance="± 20%", Inductor Construction=Shielded, Manufacturer=MURATA, Manufacturer Part Number=FDSD0420-H-1R5M=P3, Power Inductor Case="4.2mm x 4.2mm x 2", RMS Current (Irms)=5.1, Saturation Current (Isat)=7.7, Supplier Part Number 1=2530091, ComponentLink1Description=http://www.farnell.com/datasheets/2021980.pdf, ComponentLink1URL=http://www.farnell.com/datasheets/2021980.pdf, MSL="MSL 1 - Unlimited<!--FANDB--><div class=\"features-and-benefits-container\"></div>", Packaging=Each, Pricing 1="5=0.79, 50=0.448, 250=0.422, 500=0.377, 1000=0.305, 2000=0.298, 10000=0.291, 20000=0.284 (GBP)", Product Range="FDSD0420 Series", RoHS=YES, Stock 1=1471, Supplier 1=Farnell, SVHC="No SVHC (17-Dec-2015)"
L3: library part PFL2015-222MEB, "Fixed Inductors PFL2015 Shld Power 2.2 uH 20 % 1 A", DC Current Rating=1A, DC Resistance Max=0.21ohm, Inductance Tolerance="± 20%", Inductor Case Style=SMD, Manufacturer=Coilcraft, Self Resonant Frequency=100MHz, ComponentLink1Description=https://datasheet.ciiva.com/22701/1681966-22701687.pdf, ComponentLink1URL=https://datasheet.ciiva.com/22701/1681966-22701687.pdf, ComponentLink2Description=https://datasheet.ciiva.com/22679/1681966-22679157.pdf, ComponentLink2URL=https://datasheet.ciiva.com/22679/1681966-22679157.pdf, Core Material="(Not Applicable)", Inductance=2.2µH, Manufacturer Part Number=PFL2015-222MEB, Pricing 1="1=0.475, 200=0.383, 500=0.333 (EUR)", Product Range="Coilcraft - PFL2015 Series", Stock 1=3300, Supplier 1=Farnell, SVHC="To Be Advised"
P1 P3 P7: "Header, 2-Pin", LatestRevisionDate=17-Jul-2002, LatestRevisionNote="Re-released for DXP Platform.", Publisher="Altium Limited"
P5: "Header, 8-Pin", LatestRevisionDate=17-Jul-2002, LatestRevisionNote="Re-released for DXP Platform.", Publisher="Altium Limited"
P6: "Header, 20-Pin, Dual row", LatestRevisionDate=17-Jul-2002, LatestRevisionNote="Re-released for DXP Platform.", Publisher="Altium Limited"
P8: "Header, 4-Pin", LatestRevisionDate=17-Jul-2002, LatestRevisionNote="Re-released for DXP Platform.", Publisher="Altium Limited"
R1 R14 R28 R29: "MULTICOMP - MCMR06X471 JTL - RES, CERAMIC, 470R, 5%, 0.1W, 0603", Manufacturer=MULTICOMP, Manufacturer Part Number="MCMR06X471 JTL", Supplier Part Number 1=2073513, ComponentLink1Description=http://www.farnell.com/datasheets/1716707.pdf, ComponentLink1URL=http://www.farnell.com/datasheets/1716707.pdf, Pricing 1="10=0.0089, 100=0.0076, 500=0.0063, 1000=0.0049, 2500=0.0033, 5000=0.0024, 25000=0.0016, 50000=0.0013 (GBP)", RoHS=Y-EX, Stock 1=3786, Supplier 1=Farnell
R2 R4 R11 R26 R27 R34: "BOURNS - CR0603-J/-000ELF - RES, THICK FILM, 0R, 5%, 0.1W, 0603", Manufacturer=BOURNS, Manufacturer Part Number=CR0603-J/-000ELF, Power Rating=100, Resistance=0, Resistance Tolerance="± 5%", Resistor Case Style="0603 [1608 Metric]", Resistor Element Material="Thick Film", Resistor Mounting="Surface Mount Device<!--FANDB--><div class=\"features-and-benefits-container\"><div class=\"features-and-benefits-description\"><span class=\"features-benefits-value\">The Bourns CR series are standard thick film chip resistors. These resistors provide flexibility of performance, space saving and low cost. The Resistance range includes E96 and E24 decade values from 1ohm to 10Mohm.</span></div><div class=\"features-and-benefits-list\"><ul class=\"features-and-benefits-list-list\"><li class=\"features-and-benefits-list-item\">0201, 0402, 0603, 0805, 1206, 1210, 2010, 2512 standard case sizes available</li><li class=\"features-and-benefits-list-item\">±1% and ±5% tolerance</li><li class=\"features-and-benefits-list-item\">±100ppm/°C, ±200ppm/°C and ±250ppm/°C TCR values available</li><li class=\"features-and-benefits-list-item\">Power rating selectable for 50mW, 63mW, 0.1W, 0.125W, 0.25W, 0.5W and 1W based on ordering</li><li class=\"features-and-benefits-list-item\">Jumpers are available for all size</li><li class=\"features-and-benefits-list-item\">3 layer termination process with nickel barrier prevents leaching & provides excellent solderability</li><li class=\"features-and-benefits-list-item\">Suitable for all type of soldering processes</li><li class=\"features-and-benefits-list-item\">Tight dimensional tolerances</li><li class=\"features-and-benefits-list-item\">Maximum working voltage depends on case size</li><li class=\"features-and-benefits-list-item\">Operating temperature of -55°C to +125°C(CR0201) and -55°C to +155", Supplier Part Number 1=2008343, Temperature Coefficient=-, Voltage Rating=50, Automotive Qualification Standard=-, ComponentLink1Description=http://www.bourns.com/engineering/CHPREZTR/cr0603.stp, ComponentLink1URL=http://www.bourns.com/engineering/CHPREZTR/cr0603.stp, ComponentLink2Description=http://www.farnell.com/datasheets/2178762.pdf, ComponentLink2URL=http://www.farnell.com/datasheets/2178762.pdf, MSL="MSL 1 - Unlimited", Packaging="Cut Tape", Pricing 1="10=0.0146, 250=0.0097, 1000=0.0073, 5000=0.0049, 12500=0.0042 (GBP)", Product Range="CR Series", RoHS=YES, Stock 1=58200, Supplier 1=Farnell, SVHC="No SVHC (17-Dec-2015)"
R3: "MULTICOMP - MCMR06X5601FTL - RES, CERAMIC, 5K6, 1%, 0.1W, 0603", Manufacturer=MULTICOMP, Manufacturer Part Number=MCMR06X5601FTL, Power Rating=100, Resistance=5.6, Resistance Tolerance="± 1%", Resistor Case Style="0603 [1608 Metric]", Resistor Element Material=Ceramic, Resistor Mounting="Surface Mount Device<!--FANDB--><div class=\"features-and-benefits-container\"><div class=\"features-and-benefits-desc-container\"><span class=\"features-and-benefits-container-desc\">SMD Chip Resistor, Ceramic, 5.6 kohm, 75 V, 0603 [1608 Metric], 100 mW, ± 1%, MCMR Series</span></div><div class=\"features-and-benefits-description\"><span class=\"features-benefits-value\">The Multicomp MCMR series resistors are automotive grade, anti sulphured thick film chip resistor. The resistance range includes E24 and E96 decade values from 1ohm to 10Mohm. These resistors are constructed on top of a high grade ceramic body.</span></div><div class=\"features-and-benefits-list\"><ul class=\"features-and-benefits-list-list\"><li class=\"features-and-benefits-list-item\">EIA 0402, 0603, 0805, 1206 chip sizes available</li><li class=\"features-and-benefits-list-item\">High reliability and stability</li><li class=\"features-and-benefits-list-item\">Automotive grade AEC-Q200 compliant</li><li class=\"features-and-benefits-list-item\">Complaint with (IEC 60068-1) 55/155/56 climatic category</li><li class=\"features-and-benefits-list-item\">Maximum operation voltage of 50V, 75V, 150V and 200V</li><li class=\"features-and-benefits-list-item\">Power rating of 62.5mW, 100mW, 125mW and 250mW</li><li class=\"features-and-benefits-list-item\">Available in ±1% and ±5% tolerance</li><li class=\"features-and-benefits-list-item\">Temperature coefficient (TCR) of +200ppm/°C, +100ppm/°C and -200ppm/°C to +400ppm/°C</li><li class=\"features-and-benefits-list-item\">Operating temperature range -55°C to 155", Supplier Part Number 1=2073537, Temperature Coefficient="± 100", Voltage Rating=75, Automotive Qualification Standard=-, ComponentLink1Description=http://www.farnell.com/datasheets/1716707.pdf, ComponentLink1URL=http://www.farnell.com/datasheets/1716707.pdf, Packaging="Cut Tape", Pricing 1="10=0.0088, 100=0.0053, 500=0.0037, 1000=0.0029, 2500=0.0024 (GBP)", Product Range="MCMR Series", RoHS=Y-EX, Stock 1=9135, Supplier 1=Farnell, SVHC="No SVHC (07-Jul-2017)"
R5: "MULTICOMP - MCWR06X3901FTL - RES, THICK FILM, 3K9, 1%, 0.1W, 0603", Manufacturer=MULTICOMP, Manufacturer Part Number=MCWR06X3901FTL, Power Rating=100, Resistance=3.9, Resistance Tolerance="± 1%", Resistor Case Style="0603 [1608 Metric]", Resistor Element Material="Thick Film", Supplier Part Number 1=2447363, Temperature Coefficient="± 100", Voltage Rating=50, Automotive Qualification Standard=-, ComponentLink1Description=http://www.farnell.com/datasheets/1849611.pdf, ComponentLink1URL=http://www.farnell.com/datasheets/1849611.pdf, Packaging="Cut Tape", Pricing 1="10=0.0032, 100=0.002, 500=0.0013, 1000=0.0011, 2500=0.0009 (GBP)", Product Range="MCWR Series", RoHS=Y-EX, Stock 1=19057, Supplier 1=Farnell, SVHC="No SVHC (07-Jul-2017)<!--FANDB--><div class=\"features-and-benefits-container\"><div class=\"features-and-benefits-desc-container\"><span class=\"features-and-benefits-container-desc\">SMD Chip Resistor, Thick Film, 3.9 kohm, 50 V, 0603 [1608 Metric], 100 mW, ± 1"
R6 R9 R10 R15 R21 R22 R23: "MULTICOMP - MCMR06X103 JTL - RES, CERAMIC, 10K, 5%, 0.1W, 0603", Manufacturer=MULTICOMP, Manufacturer Part Number="MCMR06X103 JTL", Power Rating=100, Resistance=10, Resistance Tolerance="± 5%", Resistor Case Style="0603 [1608 Metric]", Resistor Element Material=Ceramic, Supplier Part Number 1=2073356, Temperature Coefficient="± 100", Voltage Rating=75, Automotive Qualification Standard="-<!--FANDB--><div class=\"features-and-benefits-container\"><div class=\"features-and-benefits-description\"><span class=\"features-benefits-value\">The Multicomp MCMR series resistors are automotive grade, anti sulphured thick film chip resistor. The resistance range includes E24 and E96 decade values from 1ohm to 10Mohm. These resistors are constructed on top of a high grade ceramic body.</span></div><div class=\"features-and-benefits-list\"><ul class=\"features-and-benefits-list-list\"><li class=\"features-and-benefits-list-item\">EIA 0402, 0603, 0805, 1206 chip sizes available</li><li class=\"features-and-benefits-list-item\">High reliability and stability</li><li class=\"features-and-benefits-list-item\">Automotive grade AEC-Q200 compliant</li><li class=\"features-and-benefits-list-item\">Complaint with (IEC 60068-1) 55/155/56 climatic category</li><li class=\"features-and-benefits-list-item\">Maximum operation voltage of 50V, 75V, 150V and 200V</li><li class=\"features-and-benefits-list-item\">Power rating of 62.5mW, 100mW, 125mW and 250mW</li><li class=\"features-and-benefits-list-item\">Available in ±1% and ±5% tolerance</li><li class=\"features-and-benefits-list-item\">Temperature coefficient (TCR) of +200ppm/°C, +100ppm/°C and -200ppm/°C to +400ppm/°C</li><li class=\"features-and-benefits-list-item\">Operating temperature range -55°C to 155", ComponentLink1Description=http://www.farnell.com/datasheets/1716707.pdf, ComponentLink1URL=http://www.farnell.com/datasheets/1716707.pdf, Packaging="Cut Tape", Pricing 1="10=0.0087, 100=0.0074, 500=0.0061, 1000=0.0048, 2500=0.0032, 5000=0.0024, 25000=0.0016, 50000=0.0013 (GBP)", Product Range="MCMR Series", RoHS=Y-EX, Stock 1=19791, Supplier 1=Farnell
R7: "MULTICOMP - MCWR06X2200FTL - RES, THICK FILM, 220R, 1%, 0.1W, 0603", Manufacturer=MULTICOMP, Manufacturer Part Number=MCWR06X2200FTL, Power Rating=100, Resistance=220, Resistance Tolerance="± 1%", Resistor Case Style="0603 [1608 Metric]", Resistor Element Material="Thick Film", Supplier Part Number 1=2447298, Temperature Coefficient="± 100", Voltage Rating=50, Automotive Qualification Standard=-, ComponentLink1Description=http://www.farnell.com/datasheets/1849611.pdf, ComponentLink1URL=http://www.farnell.com/datasheets/1849611.pdf, Packaging="Cut Tape", Pricing 1="10=0.0031, 100=0.0018, 500=0.0013, 1000=0.001, 2500=0.0008 (GBP)", Product Range="MCWR Series", RoHS=Y-EX, Stock 1=124834, Supplier 1=Farnell, SVHC="No SVHC (07-Jul-2017)<!--FANDB--><div class=\"features-and-benefits-container\"><div class=\"features-and-benefits-desc-container\"><span class=\"features-and-benefits-container-desc\">SMD Chip Resistor, Thick Film, 220 ohm, 50 V, 0603 [1608 Metric], 100 mW, ± 1"
R8: "MULTICOMP - MCWR06X1503FTL - RES, THICK FILM, 150KOHM, 1%, 0.1W", Manufacturer=MULTICOMP, Manufacturer Part Number=MCWR06X1503FTL, Power Rating=100, Resistance=150, Resistance Tolerance="± 1%", Resistor Case Style="0603 [1608 Metric]", Resistor Element Material="Thick Film", Supplier Part Number 1=2447254, Temperature Coefficient="± 100", Voltage Rating=50, Automotive Qualification Standard=-, ComponentLink1Description=http://www.farnell.com/datasheets/1849611.pdf, ComponentLink1URL=http://www.farnell.com/datasheets/1849611.pdf, Packaging="Cut Tape", Pricing 1="10=0.0033, 100=0.002, 500=0.0014, 1000=0.0011, 2500=0.0009 (GBP)", Product Range="MCWR Series", RoHS=Y-EX, Stock 1=11455, Supplier 1=Farnell, SVHC="No SVHC (07-Jul-2017)<!--FANDB--><div class=\"features-and-benefits-container\"><div class=\"features-and-benefits-desc-container\"><span class=\"features-and-benefits-container-desc\">SMD Chip Resistor, Thick Film, 150 kohm, 50 V, 0603 [1608 Metric], 100 mW, ± 1"
R12: "VISHAY - RCA060310R0FKEA - RES, AUTO, THICK FILM, 10R, 1%, 0603", Manufacturer=VISHAY, Manufacturer Part Number=RCA060310R0FKEA, Power Rating=100, Resistance=10, Resistance Tolerance="± 1%", Resistor Case Style="0603 [1608 Metric]", Resistor Element Material="Thick Film", Supplier Part Number 1=2616585, Temperature Coefficient="± 100", Voltage Rating=75, Automotive Qualification Standard=AEC-Q200, ComponentLink1Description=http://www.farnell.com/datasheets/2111201.pdf, ComponentLink1URL=http://www.farnell.com/datasheets/2111201.pdf, Packaging="Cut Tape", Pricing 1="10=0.0803, 100=0.0386, 500=0.0235, 2500=0.015, 5000=0.0135, 10000=0.0108, 50000=0.0068, 100000=0.0067 (GBP)", Product Range="RCA Series", RoHS=YES, Stock 1=9559, Supplier 1=Farnell, SVHC="No SVHC (17-Dec-2015)<!--FANDB--><div class=\"features-and-benefits-container\"><div class=\"features-and-benefits-description\"><span class=\"features-benefits-value\">The RCA series from Vishay are automotive grade, sulphur resistant thick film rectangular chip resistors. The resistance range includes E24 and E96 decade values from 1ohm to 10Mohm. They provide superior resistance against H2S atmosphere. These resistors have metal glaze on high quality ceramic.</span></div><div class=\"features-and-benefits-list\"><ul class=\"features-and-benefits-list-list\"><li class=\"features-and-benefits-list-item\">Automotive grade AEC-Q200 qualified (rev C)</li><li class=\"features-and-benefits-list-item\">EIA 0402, 0603, 0805, 1206, 1210, 1218, 2010 and 2512 case sizes available</li><li class=\"features-and-benefits-list-item\">Available in ±0.5%, ±1% and ±5% tolerances</li><li class=\"features-and-benefits-list-item\">Jumpers are also available</li><li class=\"features-and-benefits-list-item\">±50ppm/K, ±100ppm/K and ±200ppm/K TCR values</li><li class=\"features-and-benefits-list-item\">Power rating of 0.063W, 0.10W, 0.125W, 0.25W, 0.5W, 0.75W and 1W at 70?C</li><li class=\"features-and-benefits-list-item\">Available in 50V, 75V, 150V, 200V, 400V and 500V limiting voltage options</li><li class=\"features-and-benefits-list-item\">Category temperature range from -55?C to 155?C</li><li class=\"features-and-benefits-list-item\">Stability ?R/R = 1 % for 1000h at 70"